# EAGLE board ece4416-project-v2 (EAGLE 6.2)
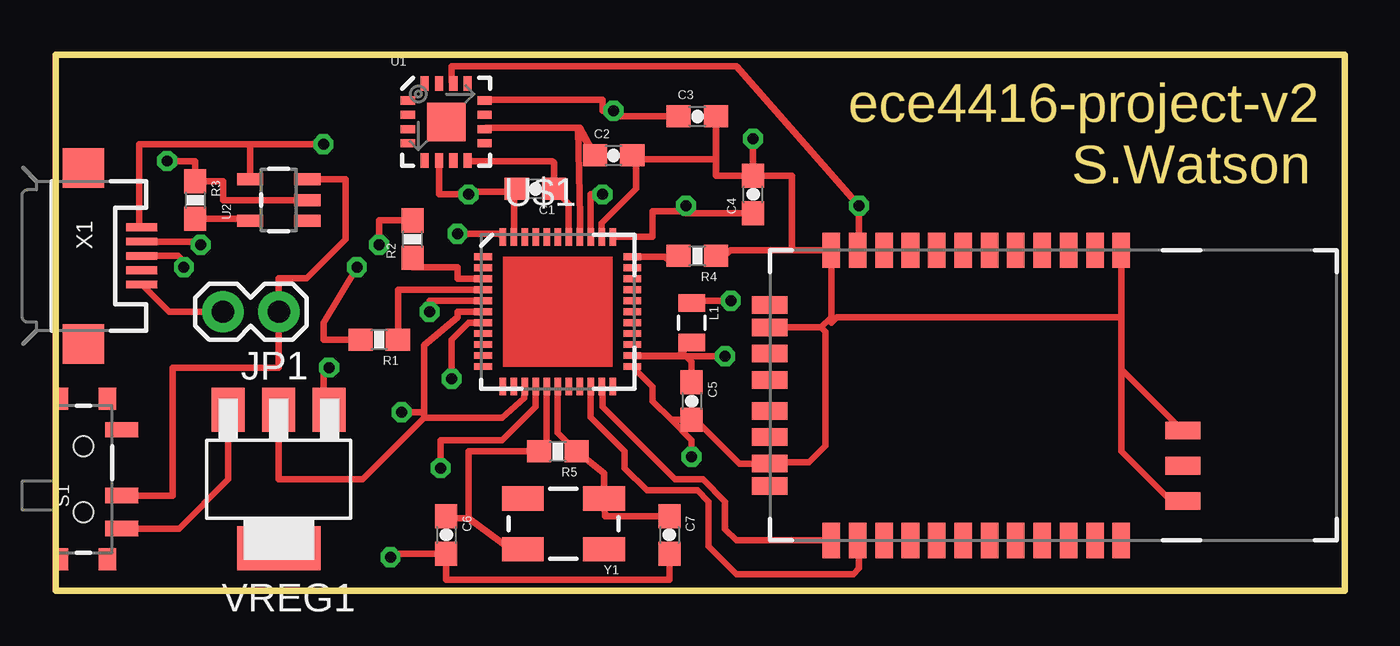
[diagram p0: board, top side]
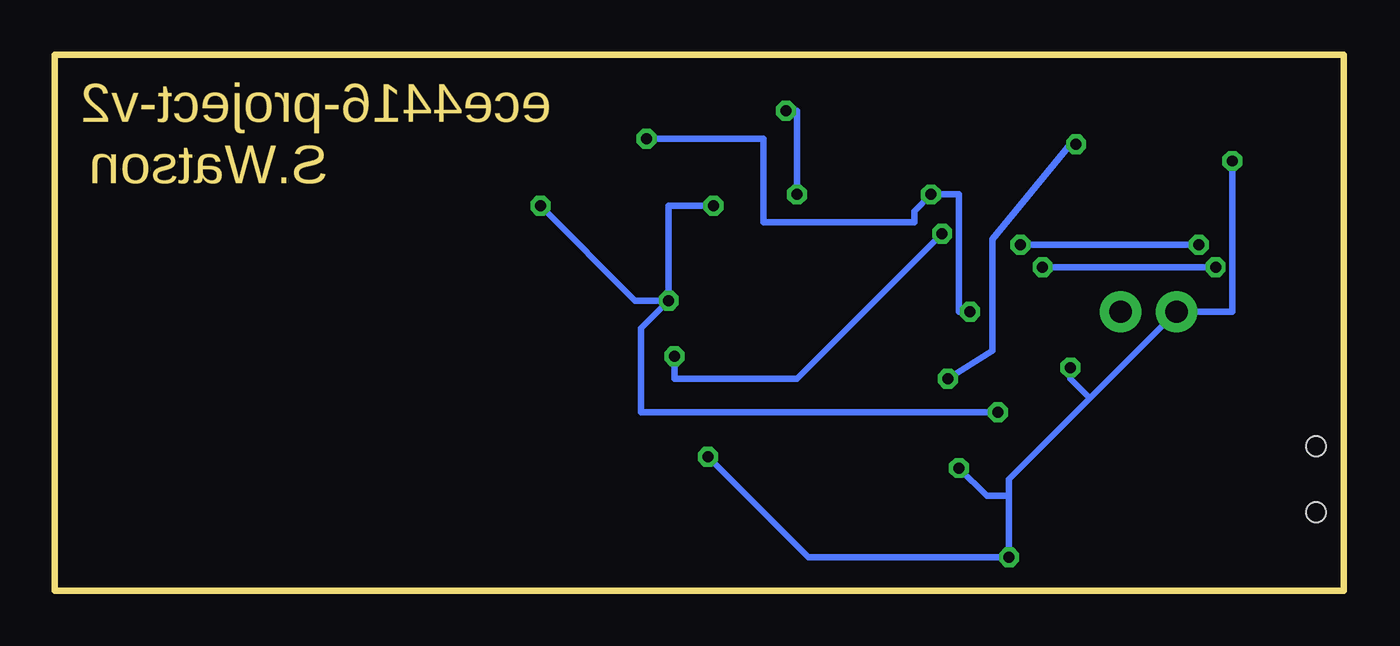
[diagram p1: board, bottom side, seen from below]

Size 58.67 x 24.38 mm. Coordinates in mm from the lower left corner, seen from the top.
Outline: 0,0 0,24.38 58.67,24.38 58.67,0 0.25,0 0,0
Copper layers (1*16): Top 0.035mm / dielectric 1.5mm / Bottom 0.035mm
Design rules: minimum track width 10mil, minimum drill 24mil, track to track 8mil, track to pad 8mil, pad to pad 8mil, via to via 8mil, smd to smd 8mil, copper to edge 40mil, drill to drill 8mil, minimum pad ring 10mil, minimum via ring 8mil, stop-mask expansion 4mil, vias tented up to drill 0mil, thermal gap 10mil

## Footprints (pad centres in the part's own frame; a part is rotated, then mirrored left to right if it is on the bottom)
0603-CAP = smd 1.1 x 1: 1 -0.85,0; 2 0.85,0
1X02 = drill 1.016 pad 1.88: 1 0,0; 2 2.54,0
0805 = smd 0.8 x 1.2: 1 -0.9,0; 2 0.9,0
0603-RES = smd 1.1 x 1: 1 -0.85,0; 2 0.85,0
SWITCH-SPST-SMD-A = smd 0.7 x 1.5: 1 -2.25,-1.75; 2 -0.75,-1.75; 3 2.25,-1.75 | smd 1 x 0.6: GND1 -3.65,1; GND3 3.65,1 | smd 1 x 0.8: GND2 -3.65,-1.1; GND4 3.65,-1.1 | hole 0.9: -1.5,0; 1.5,0
LFCSP-16 = smd 1.75 x 1.75: 0 0,0 | smd 0.65 x 0.37: 1 -1.75,0.975; 2 -1.75,0.325; 3 -1.75,-0.325; 4 -1.75,-0.975; 9 1.75,-0.975; 10 1.75,-0.325; 11 1.75,0.325; 12 1.75,0.975 | smd 0.37 x 0.65: 5 -0.975,-1.75; 6 -0.325,-1.75; 7 0.325,-1.75; 8 0.975,-1.75; 13 0.975,1.75; 14 0.325,1.75; 15 -0.325,1.75; 16 -0.975,1.75
SOT23-5 = smd 0.55 x 1.2: 1 -0.95,-1.3; 2 0,-1.3; 3 0.95,-1.3; 4 0.95,1.3; 5 -0.95,1.3
QFN-44 = smd 0.8 x 0.3: 1 -3.4,2.5; 2 -3.4,2; 3 -3.4,1.5; 4 -3.4,1; 5 -3.4,0.5; 6 -3.4,0; 7 -3.4,-0.5; 8 -3.4,-1; 9 -3.4,-1.5; 10 -3.4,-2; 11 -3.4,-2.5; 23 3.4,-2.5; 24 3.4,-2; 25 3.4,-1.5; 26 3.4,-1; 27 3.4,-0.5; 28 3.4,0; 29 3.4,0.5; 30 3.4,1; 31 3.4,1.5; 32 3.4,2; 33 3.4,2.5 | smd 0.3 x 0.8: 12 -2.5,-3.4; 13 -2,-3.4; 14 -1.5,-3.4; 15 -1,-3.4; 16 -0.5,-3.4; 17 0,-3.4; 18 0.5,-3.4; 19 1,-3.4; 20 1.5,-3.4; 21 2,-3.4; 22 2.5,-3.4; 34 2.5,3.4; 35 2,3.4; 36 1.5,3.4; 37 1,3.4; 38 0.5,3.4; 39 0,3.4; 40 -0.5,3.4; 41 -1,3.4; 42 -1.5,3.4; 43 -2,3.4; 44 -2.5,3.4
RN41 = smd 0.8 x 1.6: 1 -6.6,-6.6; 2 -5.4,-6.6; 3 -4.2,-6.6; 4 -3,-6.6; 5 -1.8,-6.6; 6 -0.6,-6.6; 7 0.6,-6.6; 8 1.8,-6.6; 9 3,-6.6; 10 4.2,-6.6; 11 5.4,-6.6; 12 6.6,-6.6; 13 6.6,6.6; 14 5.4,6.6; 15 4.2,6.6; 16 3,6.6; 17 1.8,6.6; 18 0.6,6.6; 19 -0.6,6.6; 20 -1.8,6.6; 21 -3,6.6; 22 -4.2,6.6; 23 -5.4,6.6; 24 -6.6,6.6 | smd 1.6 x 0.8: 25 -9.4,4.8; 26 -9.4,3.2; 27 -9.4,1.6; 28 9.4,3.1; 29 9.4,-3.1; 30 9.4,-4.122; 31 9.4,-1.9; 32 9.4,-0.7; 33 9.4,0.7; 34 9.4,1.9; 35 9.4,4.122
SOT-223 = smd 1.5 x 2: 1 -2.3,-3.15; 2 0,-3.15; 3 2.3,-3.15 | smd 3.8 x 2: 4 0,3.15
USB-MICROB = smd 0.35 x 1.4: D+ 0,2.65; D- -0.65,2.65; GND 1.3,2.65; ID 0.65,2.65; VBUS -1.3,2.65 | smd 1.8 x 1.9: MT1 -4,0; MT2 4,0
CRYSTAL-SMD-5X3 = smd 1.9 x 1.1: 1 -1.85,-1.15; 2 1.85,-1.15; 3 1.85,1.15; 4 -1.85,1.15

## Placement (x,y rotation side)
C1  0.1u  [0603-CAP]  21.84,18.29 180 top
C2  0.1u  [0603-CAP]  25.4,19.81 0 top
C3  0.1u  [0603-CAP]  29.21,21.59 0 top
C4  1u  [0603-CAP]  31.75,18.03 90 top
C5  1u  [0603-CAP]  28.96,8.64 270 top
C6  22p  [0603-CAP]  17.78,2.54 270 top
C7  22p  [0603-CAP]  27.94,2.54 270 top
JP1  [1X02]  10.16,12.7 180 top
L1  [0805]  28.96,12.19 270 top
R1  22  [0603-RES]  14.73,11.43 180 top
R2  22  [0603-RES]  16.26,16 90 top
R3  2k  [0603-RES]  6.35,17.78 270 top
R4  10k  [0603-RES]  29.21,15.24 180 top
R5  1M  [0603-RES]  22.86,6.35 180 top
S1  [SWITCH-SPST-SMD-A]  1.27,5.08 90 top
U1  ADXL335  [LFCSP-16]  17.78,21.34 0 top
U2  MCP73831  [SOT23-5]  10.16,17.78 90 top
U$1  ATMEGA32U4QFN  [QFN-44]  22.86,12.7 0 top
U$2  BLUETOOTH-RN41"  [RN41]  41.91,8.89 180 top
VREG1  [SOT-223]  10.16,5.08 180 top
X1  USB-MICROB  [USB-MICROB]  1.27,15.24 270 top
Y1  16M  [CRYSTAL-SMD-5X3]  23.11,3.05 180 top

## Library data of the parts
C1-C7 JP1 L1 R1-R5 S1 U1 U2 U$1 U$2 X1 Y1 = SparkFun
VREG1 = dp_devices

## Nets
3.3V: C4.1 L1.1 U1.14 U$1.6 U$1.14 U$1.34 U$2.11 VREG1.2
BT_RX: U$1.21 U$2.13
BT_TX: U$1.20 U$2.14
MISO: U$1.11
MOSI: U$1.10
N$1: S1.1 VREG1.3
N$2: R2.2 X1.D-
N$3: R1.2 X1.D+
N$4: R4.2 U$1.33
N$5: R3.2 U2.5
N$7: C5.1 L1.2 U$1.24 U$1.44
N$9: C6.1 R5.2 U$1.16 Y1.3
N$10: C7.1 R5.1 U$1.17 Y1.1
N$25: C1.2 C2.2 C3.2 C4.2 C5.2 C6.2 C7.2 JP1.2 R3.1 R4.1 U1.6 U2.2 U$1.5 U$1.15 U$1.23 U$1.35 U$1.43 U$2.1 U$2.12 U$2.25 U$2.27 U$2.28 U$2.29 VREG1.1 X1.GND
RST: U$1.13
SCK: U$1.9
USB_D+: R1.1 U$1.4
USB_D-: R2.1 U$1.3
VCC: JP1.1 S1.2 U2.3
VUSB: U2.4 U$1.7 X1.VBUS
XOUT: C3.1 U1.12 U$1.36
YOUT: C2.1 U1.10 U$1.37
ZOUT: C1.1 U1.8 U$1.38

## Tracks (layer width: path | path; a pad name or v marks a point on that pad's centre or on a via)
3.3V  (via drill 0.5)
  Top 0.305: VREG1.2 10.16,5.08 13.97,5.08 16.76,7.87 | 16.76,7.87 20.32,7.87 21.34,8.77 U$1.14 | U$1.6 18.29,12.7 18.29,12.45 16.76,11.18 16.76,8.13 | 16.76,8.13 16.76,7.87 | 16.76,8.13 v15.75,8.13 | L1.1 29.07,13.21 v30.73,13.21 | U$2.11 36.58,15.56 v36.58,17.53 30.99,23.88 18.03,23.88 18.03,23.16 U1.14 | C4.1 28.7,17.18 v28.7,17.53 28.7,17.27 27.18,17.27 27.18,16.1 U$1.34
  Bottom 0.305: v15.75,8.13 32,8.13 32,11.94 v30.73,13.21 | v36.58,17.53 32.26,13.21 v30.73,13.21 | v28.7,17.53 30.73,17.53 v30.73,13.21
BT_RX
  Top 0.305: U$2.13 30.98,2.29 30.48,2.79 30.48,4.06 29.46,5.08 28.19,5.08 24.89,8.38 24.89,9.27 U$1.21
BT_TX
  Top 0.305: U$1.20 24.36,7.9 25.91,6.35 25.91,5.59 26.92,4.57 29.21,4.57 29.72,4.06 29.72,2.03 30.99,0.76 36.32,0.76 36.58,1.02 36.58,2.22 U$2.14
N$1
  Top 0.305: S1.1 5.62,2.83 7.86,5.07 VREG1.3
N$2  (via drill 0.5)
  Top 0.305: v6.6,15.75 6.46,15.89 X1.D- | R2.2 14.73,16.85 v14.73,15.75
  Bottom 0.305: v6.6,15.75 v14.73,15.75
N$3  (via drill 0.5)
  Top 0.305: X1.D+ 5.59,15.24 5.84,14.99 v5.84,14.73 | v13.72,14.73 12.19,12.19 12.19,11.43 R1.2
  Bottom 0.305: v13.72,14.73 v5.84,14.73
N$4
  Top 0.305: R4.2 28.19,15.24 27.94,14.99 27.73,15.2 U$1.33
N$5
  Top 0.305: R3.2 8.86,16.93 U2.5
N$6  (via drill 0.5)
  other vias: 18.8,18.03
N$7  (via drill 0.5)
  Top 0.305: 28.52,10.85 28.36,10.7 U$1.24 26.29,10.67 29.97,10.67 v30.48,10.67 | 28.52,10.85 L1.2 | C5.1 28.96,10.41 28.52,10.85 | U$1.44 20.2,16.26 v18.29,16.26
  Bottom 0.305: v18.29,16.26 24.89,9.65 30.48,9.65 v30.48,10.67
N$8  (via drill 0.5)
  other vias: 15.24,1.52
N$9
  Top 0.305: C6.1 17.87,3.3 18.8,3.3 | 18.8,3.3 20.71,1.9 Y1.3 | 18.8,3.3 18.8,6.35 R5.2 22.36,6.7 U$1.16
N$10
  Top 0.305: C7.1 25.01,3.39 Y1.1 24.96,5.35 R5.1 22.86,7.2 U$1.17
N$11  (via drill 0.5)
  other vias: 12.45,10.16
N$12  (via drill 0.5)
  other vias: 30.73,13.21
N$13  (via drill 0.5)
  other vias: 24.89,18.03
N$14  (via drill 0.5)
  other vias: 25.4,21.84
N$15  (via drill 0.5)
  other vias: 12.19,20.32
N$16  (via drill 0.5)
  other vias: 18.03,9.65
N$17  (via drill 0.5)
  other vias: 28.96,6.1
N$18  (via drill 0.5)
  other vias: 17.53,5.59
N$19  (via drill 0.5)
  other vias: 18.29,16.26
N$20  (via drill 0.5)
  other vias: 30.48,10.67
N$21  (via drill 0.5)
  other vias: 36.58,17.53
N$22  (via drill 0.5)
  other vias: 28.7,17.53
N$24  (via drill 0.5)
  other vias: 17.02,12.7
N$25  (via drill 0.5)
  Top 0.305: 32,18.8 31.75,18.8 C4.2 | C4.2 v31.75,20.57 | U2.2 7.62,17.78 7.62,18.63 R3.1 6.35,19.56 v5.08,19.56 | X1.GND 5.16,12.7 JP1.2 | C7.2 27.94,0.51 17.78,0.51 C6.2 15.41,1.69 v15.24,1.52 | VREG1.1 12.29,8.23 12.19,8.13 12.19,9.91 v12.45,10.16 | U$2.1 48.51,12.45 | 48.51,12.45 48.51,10.16 | 48.51,10.16 48.51,10.09 U$2.27 | U$2.25 50.77,4.09 48.51,6.35 48.51,10.16 | 34.85,11.99 U$2.29 32.46,11.94 | 34.85,11.99 35.31,12.45 | 35.31,12.45 U$2.12 33.53,15.49 | 34.85,11.99 35.05,11.79 35.05,6.6 34.29,5.84 33.02,5.84 32.97,5.79 U$2.28 31.13,5.79 29.04,7.87 C5.2 28.03,7.79 | R4.1 30.48,15.24 30.73,15.49 33.53,15.49 | 28.03,7.79 27.18,8.64 27.18,9.28 U$1.23 | 28.03,7.79 28.96,6.86 v28.96,6.1 | U$1.15 21.84,9.28 21.84,8.38 20.32,6.86 17.53,6.86 v17.53,5.59 | 35.31,12.45 35.31,12.19 35.56,12.45 48.51,12.45 | C1.2 20.86,18.15 | 20.86,18.15 U$1.43 | C2.2 26.42,19.65 | 26.42,19.65 26.42,18.29 24.86,16.73 U$1.35 | C4.2 33.53,18.88 33.53,15.49 | U$1.5 17.02,13.2 v17.02,12.7 | U1.6 17.45,18.03 v18.8,18.03 18.8,18.15 20.86,18.15 | 26.42,19.65 30.06,19.65 | 30.06,19.65 C3.2 | C4.2 30.06,18.88 30.06,19.65
  Bottom 0.305: v31.75,20.57 26.42,20.57 26.42,16.76 19.56,16.76 19.56,17.27 v18.8,18.03 17.53,18.03 17.53,12.7 v17.02,12.7 | v5.08,19.56 5.08,12.7 JP1.2 11.56,8.76 | 15.24,4.32 v15.24,1.52 24.38,1.52 v28.96,6.1 | 15.24,4.32 15.24,5.08 11.56,8.76 | v12.45,10.16 12.45,9.65 11.56,8.76 | v17.53,5.59 16.26,4.32 15.24,4.32
USB_D+
  Top 0.305: U$1.4 15.58,13.7 R1.1
USB_D-
  Top 0.305: U$1.3 18.29,14.2 18.29,14.73 16.26,14.73 R2.1
VCC
  Top 0.305: U2.3 13.21,18.73 13.21,16 11.43,14.22 10.16,14.22 JP1.1 10.16,10.16 5.33,10.16 5.33,4.33 S1.2
VUSB  (via drill 0.5)
  Top 0.305: X1.VBUS 3.81,16.54 3.81,20.32 8.86,20.32 | 8.86,20.32 U2.4 | U$1.7 18.8,12.2 18.03,11.43 v18.03,9.65 | v12.19,20.32 8.86,20.32
  Bottom 0.305: v18.03,9.65 16,10.92 16,16 12.45,20.32 v12.19,20.32
XOUT  (via drill 0.5)
  Top 0.305: U$1.36 24.36,18.03 v24.89,18.03 | C3.1 25.4,21.59 v25.4,21.84 24.89,21.84 24.89,22.35 19.53,22.35 U1.12
  Bottom 0.305: v24.89,18.03 24.89,21.84 v25.4,21.84
YOUT
  Top 0.305: U$1.37 23.88,16.12 23.88,17.02 23.79,20.99 C2.1 23.88,21.08 19.6,21.08 U1.10
ZOUT
  Top 0.305: U1.8 18.78,19.56 22.61,19.56 22.69,19.47 C1.1 23.36,17.62 U$1.38

## Text on the board
Dimension: ece4416-project-v2 | S.Watson